# Altium PCB Holder_Accu.PcbDoc
Units mm, origin at the board's own origin, x right, y up, seen from the top; angles counter-clockwise.
Board outline 356.65 x 138 mm, 2 copper layers (Top Layer, Bottom Layer); 20 components, 15 nets, 102 pads, 36 vias.
Unrouted connection lines stored in the file: 15.
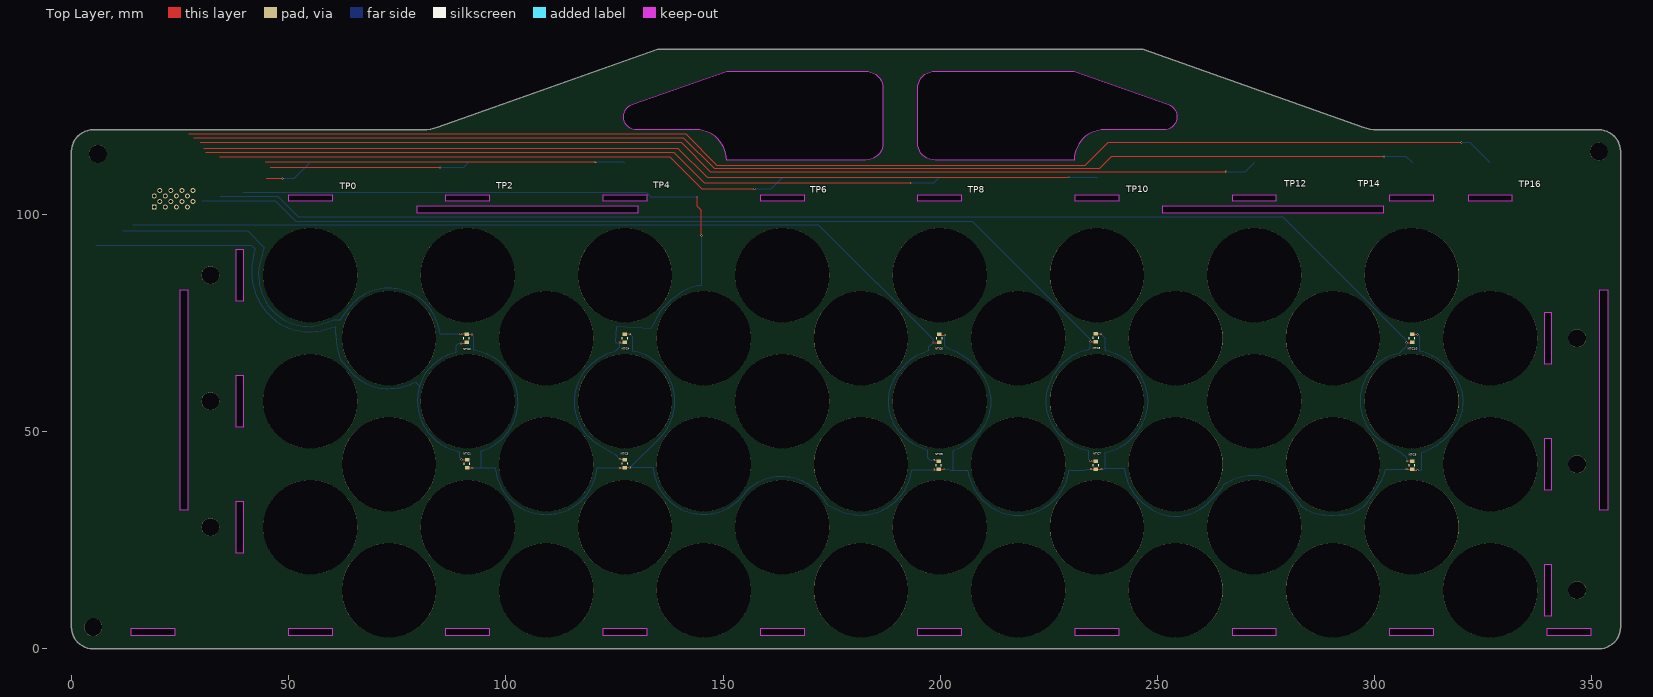
[diagram p0: Top Layer view]
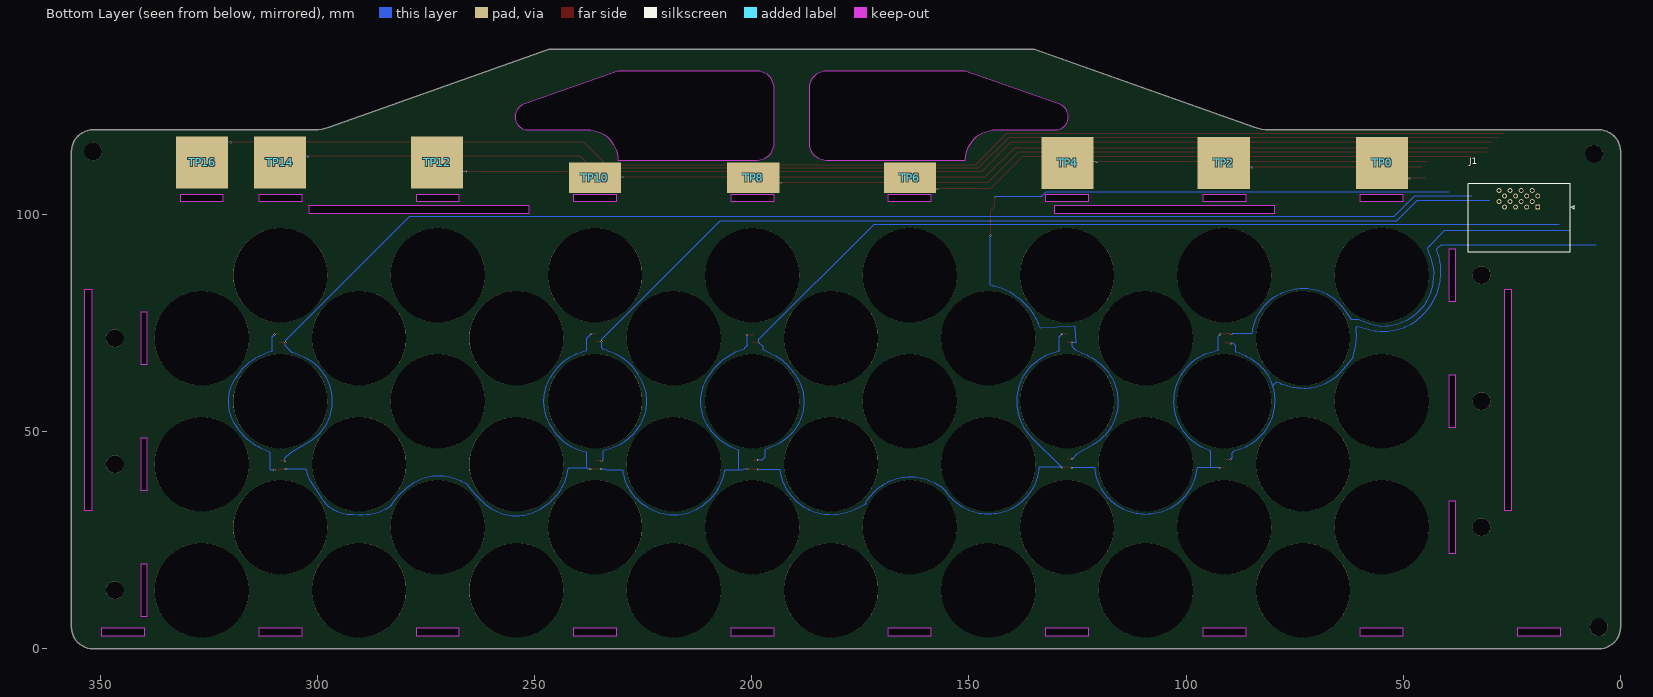
[diagram p1: Bottom Layer view, seen from below]
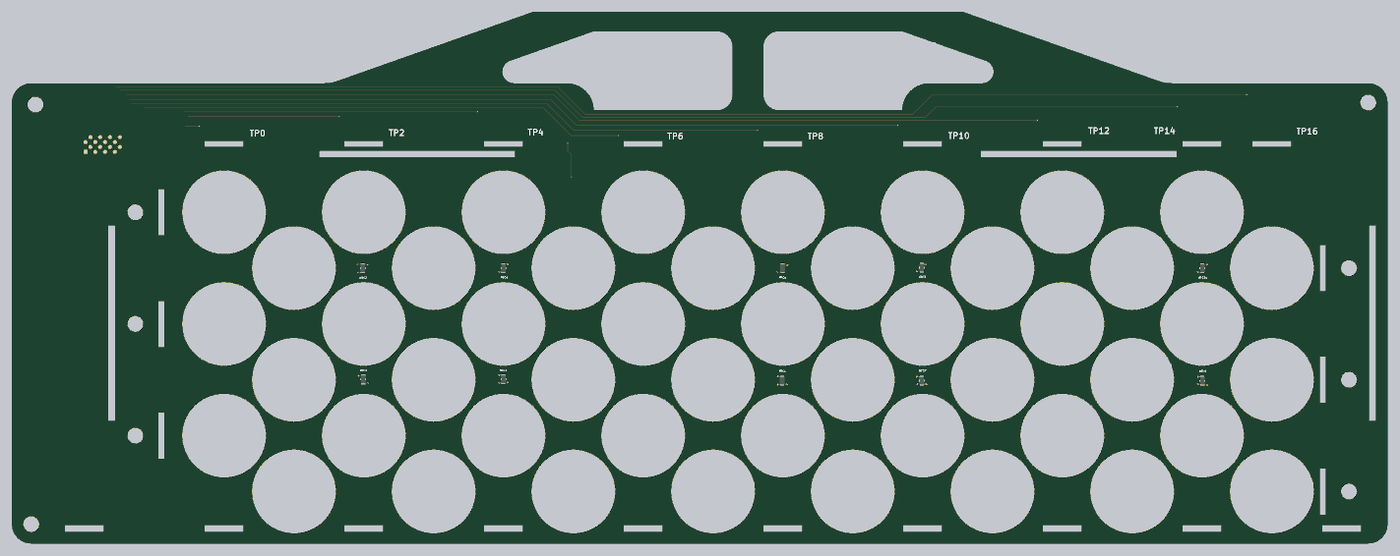
[diagram p2: 3D render of the assembled board from above, using the file's embedded part models]

## Layer stack, top to bottom
Top Solder: solder mask 0.0102, Solder Resist, Dk 3.5
Top Layer: signal copper 0.0356
Dielectric 1: dielectric 0.32, FR-4, Dk 4.8
Bottom Layer: signal copper 0.0356
Bottom Solder: solder mask 0.0102, Solder Resist, Dk 3.5

## Board outline
134.97,138.002 84.303,120.074 83.49,119.825 82.659,119.646 81.816,119.538 80.967,119.502 4.993,119.502 4.34,119.459 3.699,119.331 3.079,119.121 2.493,118.832 1.949,118.469 1.457,118.037 1.026,117.546 0.663,117.002 0.373,116.415 0.163,115.796 0.036,115.154 -0.007,114.502 -0.007,5.002 0.036,4.349 0.163,3.708 0.373,3.088 0.663,2.502 1.026,1.958 1.457,1.466 1.949,1.035 2.493,0.672 3.079,0.382 3.699,0.172 4.34,0.045 4.993,0.002 351.643,0.002 352.296,0.045 352.937,0.172 353.557,0.382 354.143,0.672 354.687,1.035 355.179,1.466 355.61,1.958 355.973,2.502 356.263,3.088 356.473,3.708 356.6,4.349 356.643,5.002 356.643,114.502 356.6,115.154 356.473,115.796 356.263,116.415 355.973,117.002 355.61,117.546 355.179,118.037 354.687,118.469 354.143,118.832 353.557,119.121 352.937,119.331 352.296,119.459 351.643,119.502 300.669,119.502 299.82,119.538 298.977,119.646 298.146,119.825 297.333,120.074 246.666,138.002
cut-out: 230.818,112.502 198.818,112.502 198.192,112.551 197.582,112.698 197.002,112.938 196.467,113.266 195.99,113.673 195.582,114.151 195.254,114.686 195.014,115.266 194.867,115.876 194.818,116.502 194.818,129.002 194.867,129.628 195.014,130.238 195.254,130.818 195.582,131.353 195.99,131.83 196.467,132.238 197.002,132.566 197.582,132.806 198.192,132.953 198.818,133.002 230.818,133.002 252.501,125.33 252.978,125.112 253.41,124.815 253.784,124.447 254.088,124.019 254.313,123.545 254.451,123.039 254.5,122.517 254.457,121.994 254.323,121.487 254.103,121.011 253.803,120.58 253.433,120.208 253.004,119.906 252.529,119.684 252.022,119.548 251.5,119.502 237.818,119.502 237.034,119.458 236.26,119.326 235.506,119.109 234.781,118.809 234.094,118.429 233.454,117.975 232.868,117.452 232.345,116.866 231.891,116.226 231.511,115.539 231.211,114.814 230.994,114.059 230.862,113.286
cut-out: 49.993,4.752 59.993,4.752 59.993,3.002 49.993,3.002
cut-out: 303.533,3.002 303.533,4.752 313.533,4.752 313.533,3.002
cut-out: 340.643,7.502 339.143,7.502 339.143,19.502 340.643,19.502
cut-out: 39.493,22.002 37.993,22.002 37.993,34.002 39.493,34.002
cut-out: 340.643,36.502 339.143,36.502 339.143,48.502 340.643,48.502
cut-out: 39.493,51.002 37.993,51.002 37.993,63.002 39.493,63.002
cut-out: 339.753,4.752 349.753,4.752 349.753,3.002 339.753,3.002
cut-out: 267.313,4.752 277.313,4.752 277.313,3.002 267.313,3.002
cut-out: 194.873,4.752 204.873,4.752 204.873,3.002 194.873,3.002
cut-out: 122.433,4.752 132.433,4.752 132.433,3.002 122.433,3.002
cut-out: 24.993,31.877 24.993,82.627 26.743,82.627 26.743,31.877
cut-out: 302.018,102.002 302.018,100.252 251.268,100.252 251.268,102.002
cut-out: 79.618,102.002 130.368,102.002 130.368,100.252 79.618,100.252
cut-out: 351.893,82.627 353.643,82.627 353.643,31.877 351.893,31.877
cut-out: 49.993,104.502 59.993,104.502 59.993,103.002 49.993,103.002
cut-out: 86.213,104.502 96.213,104.502 96.213,103.002 86.213,103.002
cut-out: 122.433,104.502 132.433,104.502 132.433,103.002 122.433,103.002
cut-out: 158.653,104.502 168.653,104.502 168.653,103.002 158.653,103.002
cut-out: 231.093,104.502 241.093,104.502 241.093,103.002 231.093,103.002
cut-out: 267.313,104.502 277.313,104.502 277.313,103.002 267.313,103.002
cut-out: 303.533,104.502 313.533,104.502 313.533,103.002 303.533,103.002
cut-out: 339.143,77.502 340.643,77.502 340.643,65.502 339.143,65.502
cut-out: 37.993,92.002 39.493,92.002 39.493,80.002 37.993,80.002
cut-out: 241.093,4.752 241.093,3.002 231.093,3.002 231.093,4.752
cut-out: 168.653,4.752 168.653,3.002 158.653,3.002 158.653,4.752
cut-out: 96.213,4.752 96.213,3.002 86.213,3.002 86.213,4.752
cut-out: 23.773,4.752 23.773,3.002 13.773,3.002 13.773,4.752
cut-out: 321.643,104.502 331.643,104.502 331.643,103.002 321.643,103.002
cut-out: 194.873,104.502 204.873,104.502 204.873,103.002 194.873,103.002
cut-out: 186.818,129.002 186.818,116.502 186.769,115.876 186.622,115.266 186.382,114.686 186.054,114.151 185.646,113.673 185.169,113.266 184.634,112.938 184.054,112.698 183.444,112.551 182.818,112.502 150.818,112.502 150.774,113.286 150.643,114.059 150.425,114.814 150.125,115.539 149.745,116.226 149.291,116.866 148.768,117.452 148.182,117.975 147.542,118.429 146.855,118.809 146.13,119.109 145.376,119.326 144.602,119.458 143.818,119.502 130.136,119.502 129.614,119.548 129.107,119.684 128.632,119.906 128.203,120.208 127.833,120.58 127.533,121.011 127.313,121.487 127.179,121.994 127.136,122.517 127.185,123.039 127.324,123.545 127.548,124.019 127.852,124.447 128.226,124.815 128.658,125.112 129.136,125.33 150.818,133.002 182.818,133.002 183.444,132.953 184.054,132.806 184.634,132.566 185.169,132.238 185.646,131.83 186.054,131.353 186.382,130.818 186.622,130.238 186.769,129.628

## Design rules (kind name [scope] priority, off if disabled: settings)
Clearance [All] p1: gap=0.254 ignorepadtopadclearanceinfootprint=FALSE
DiffPairsRouting [All] p1: maxlimit=0.2 minlimit=0.2 mostfreqgap=0.2 toplayer_minwidth=0.2 toplayer_maxwidth=0.2 toplayer_prefwidth=0.2 bottomlayer_minwidth=0.2 bottomlayer_maxwidth=0.2 bottomlayer_prefwidth=0.2 maxuncoupledlength=12.7
PolygonConnect [All] p1: connectstyle=Relief reliefconductorwidth=0.254 reliefentries=4 polygonreliefangle="90 Angle" airgapwidth=0.254
RoutingVias [All] p1: holewidth=0.711 width=1.27 viastyle="Through Hole" minholewidth=0.711 minwidth=1.27 maxholewidth=0.711 maxwidth=1.27
SolderMaskExpansion [All] p1: expansion=0.102 istentingtop=FALSE
SupplyNets "Schematic Supply Nets" [InNet('GND')] p1: voltage=0.000
UnRoutedNet [All] p1: checkbadconnections=TRUE
Width [All] p1: maxlimit=0.2 minlimit=0.2 preferedwidth=0.2
28 further rules are at their usual default settings.

## Components (designator, comment, footprint, x,y, rotation, side; value= is the part's Value field where it differs from the comment)
J1 "459850121" MOLEX_459850121 19.077,101.722 r180 bottom
NTC1 "NTC_0805" NTC_0805 91.086,42.631 r270 top
NTC2 "NTC_0805" NTC_0805 90.959,71.496 r90 top
NTC3 "NTC_0805" NTC_0805 127.408,42.667 r270 top
NTC4 "NTC_0805" NTC_0805 127.408,71.496 r90 top
NTC5 "NTC_0805" NTC_0805 199.671,42.286 r270 top
NTC6 "NTC_0805" NTC_0805 199.798,71.496 r90 top
NTC7 "NTC_0805" NTC_0805 235.866,42.286 r270 top
NTC8 "NTC_0805" NTC_0805 235.866,71.623 r90 top
NTC9 "NTC_0805" NTC_0805 308.637,42.286 r270 top
NTC10 "NTC_0805" NTC_0805 308.637,71.496 r90 top
TP0 "Test Point" TESTPOINT_WIDE#1 54.891,111.882 r0 top
TP2 "Test Point" TESTPOINT_WIDE#1 91.34,111.882 r0 top
TP4 "Test Point" TESTPOINT_WIDE#1 127.281,111.882 r0 top
TP6 "Test Point" TESTPOINT_WIDE#2 163.603,108.453 r0 top
TP8 "Test Point" TESTPOINT_WIDE#2 199.671,108.453 r0 top
TP10 "Test Point" TESTPOINT_WIDE#2 236.12,108.453 r0 top
TP12 "Test Point" TESTPOINT_WIDE#1 272.442,112.009 r0 top
TP14 "Test Point" TESTPOINT_WIDE#1 308.637,112.009 r0 top
TP16 "Test Point" TESTPOINT_WIDE#1 326.544,112.009 r0 top

## Footprints (in the part's own frame and the unit in brackets; to place one, negate y for a bottom-side part, rotate by r counter-clockwise, add the part's x,y. Pads: shape width x height; smd on the part's side, far side on the other; paste and mask are expansions set on the pad)
MOLEX_459850121 [mm]
  rect 1.11x1.11 / inner round 1.11 / far side rect 1.11x1.11 hole 0.76 mask+0.076: 1(0,0)
  round 1.11 hole 0.76 mask+0.076: 2(-1.27,1.27) 3(-2.54,0) 4(-3.81,1.27) 5(-5.08,0) 6(-6.35,1.27) 7(-7.62,0) 8(-8.89,1.27) 9(0,2.54) 10(-1.27,3.81) 11(-2.54,2.54) 12(-3.81,3.81) 13(-5.08,2.54) 14(-6.35,3.81) 15(-7.62,2.54) 16(-8.89,3.81)
  silkscreen extent -15.99,-10.4 8.38,5.38, body extent -11.94,-11.32 3.08,4.97, height 7.49
NTC_0805 [mm]
  rect 0.8x1.05 smd: 1(-0.925,0) 2(0.925,0)
  silkscreen extent -0.21,-0.63 0.21,0.63, body extent -1,-0.6 1,0.6, height 1.3
TESTPOINT_WIDE#1 [mm]
  rect 12x12 smd far side paste-2539.97: 1(0,0)
TESTPOINT_WIDE#2 [mm]
  rect 12x7 smd far side paste-2539.97: 1(0,0)

## Part data
J1: Package=None, Availability=Unavailable, MP=459850121, Price=None
NTC1 NTC2 NTC3 NTC4 NTC5 NTC6 NTC7 NTC8 NTC9 NTC10: "NTC Thermistor 10k 0805 (2012 Metric)", Package="0805 TDK", Check_prices=https://www.snapeda.com/parts/NTCG203NH103JTDS/TDK/view-part/?ref=eda, MF="TDK Corporation", MP=NTCG203NH103JTDS, SnapEDA_Link=https://www.snapeda.com/parts/NTCG203NH103JTDS/TDK/view-part/?ref=snap
TP0 TP2 TP4 TP6 TP8 TP10 TP12 TP14 TP16: library part TestPoint_Wide, "TestPoint 5x5mm"

## Free pads (board coordinates)
  round 4.1 hole 4.1: 1(31.993,28.002) 1(31.993,57.002) 1(31.993,86.002) 1(346.643,13.502) 1(346.643,42.502) 1(346.643,71.502) 2(6.09,113.959) 3(5,5) 4(351.646,114.499)
  round 21.7 hole 21.7: 1(54.993,28.002) 1(54.993,57.002) 1(54.993,86.002) 1(73.103,13.502) 1(73.103,42.502) 1(73.103,71.502) 1(91.213,28.002) 1(91.213,57.002) 1(91.213,86.002) 1(109.323,13.502) 1(109.323,42.502) 1(109.323,71.502) 1(127.433,28.002) 1(127.433,57.002) 1(127.433,86.002) 1(145.543,13.502) 1(145.543,42.502) 1(145.543,71.502) 1(163.653,28.002) 1(163.653,57.002) 1(163.653,86.002) 1(181.763,13.502) 1(181.763,42.502) 1(181.763,71.502) 1(199.873,28.002) 1(199.873,57.002) 1(199.873,86.002) 1(217.983,13.502) 1(217.983,42.502) 1(217.983,71.502) 1(236.093,28.002) 1(236.093,57.002) 1(236.093,86.002) 1(254.203,13.502) 1(254.203,42.502) 1(254.203,71.502) 1(272.313,28.002) 1(272.313,57.002) 1(272.313,86.002) 1(290.423,13.502) 1(290.423,42.502) 1(290.423,71.502) 1(308.533,28.002) 1(308.533,57.002) 1(308.533,86.002) 1(326.643,13.502) 1(326.643,42.502) 1(326.643,71.502)

## Via types
v1: diameter 0.45, hole 0.3, Top Layer to Bottom Layer, 21 vias
v2: diameter 0.45, hole 0.3, Top Layer to Bottom Layer, tented both sides, 14 vias
v3: diameter 0.4, hole 0.3, Top Layer to Bottom Layer, 1 vias

## Nets (pads, with @x,y where several pads share a name; then routed paths per layer and width w, separated by ;. In a path a pad name is that pad's centre, name@x,y a point inside that pad or via, vN(x,y) a via of type N, cw(c..) or ccw(c..) an arc to the next point about the centre after c; other vN are vias at no path point)
GND: J1.15 NTC1.2 NTC2.2 NTC3.2 NTC4.2 NTC5.2 NTC6.2 NTC7.2 NTC8.2 NTC9.2 NTC10.2 | length 586.9
  Top Layer w0.2: v2(89.562,72.512) 90.868,72.512 90.995,72.385 v2(92.229,72.385) ; NTC1.2 91.141,41.651 v1(92.356,41.651) ; v1(126.265,41.651) 127.317,41.651 127.444,41.778 v1(128.551,41.778) ; NTC4.2 127.499,72.512 v1(128.551,72.512) ; v1(198.528,41.27) 199.58,41.27 199.707,41.397 v1(200.941,41.397) ; NTC6.2 199.961,72.258 v1(201.068,72.258) ; v1(234.723,41.397) v1(237.136,41.397) ; NTC8.2 235.902,72.512 v3(237.009,72.512) ; v1(307.367,41.397) 308.601,41.397 308.855,41.143 v1(309.907,41.143) ; NTC10.2 308.673,72.385 v1(309.907,72.385)
  Bottom Layer w0.2: 11.838,96.261 40.54,96.261 44.422,92.38 44.43,92.371 44.43,92.205 43.913,90.572 ccw(c73.093,81.337) 42.947,86.626 42.951,86.597 43.194,84.469 43.195,84.462 ccw(c54.651,85.78) 54.017,74.267 55.252,74.199 ccw(c51.228,96.012) 55.276,74.203 ccw(c51.228,96.012) 60.319,75.779 61.865,75.824 61.944,75.826 62.012,75.894 63.765,78.327 cw(c72.938,71.716) 76.026,82.593 cw(c73.295,71.349) 84.724,73.157 84.807,72.629 84.924,72.512 84.987,72.512 v2(89.562,72.512) ; v2(92.229,72.385) 92.61,72.004 92.61,68.89 92.61,68.834 92.639,68.787 ccw(c92.81,68.89) 92.778,68.692 ; v1(92.356,41.651) 94.388,41.651 ; 92.778,68.692 cw(c90.951,56.978) 102.77,57.907 cw(c90.901,56.974) 94.527,45.634 ccw(c94.588,45.444) 94.397,45.502 94.388,45.473 94.388,45.444 94.388,41.651 ; v1(126.265,41.651) 121.088,41.651 120.971,41.534 120.901,41.037 cw(c109.276,42.664) 109.275,30.926 cw(c109.276,42.665) 97.592,41.534 97.475,41.651 97.41,41.651 94.388,41.651 ; v1(128.551,41.778) v1@128.678,41.778 ; v1(128.551,72.512) 129.186,71.878 129.186,68.689 129.21,68.644 ccw(c129.385,68.739) 129.348,68.543 cw(c127.239,57.039) 138.921,57.614 cw(c126.896,57.022) 135.409,48.509 v1@128.678,41.778 ; v1(198.528,41.27) 193.612,41.27 193.495,41.153 193.383,40.559 cw(c181.631,42.77) 176.36,32.035 174.021,33.184 173.977,33.227 173.785,33.573 ccw(c163.498,27.854) 157.405,37.923 156.46,37.352 156.445,37.343 156.357,37.265 155.155,36.063 155.145,36.048 155.094,35.975 cw(c145.535,42.619) 143.61,31.138 cw(c145.541,42.655) 133.958,41.173 133.898,41.642 133.781,41.759 133.715,41.759 128.697,41.759 v1@128.678,41.778 ; v1(200.941,41.397) 201.993,41.397 202.325,41.065 203.051,41.065 ; v1(201.068,72.258) 201.068,69.839 201.703,69.204 201.762,69.145 201.795,69.111 cw(c196.87,54.199) 207.976,65.303 cw(c199.499,56.828) 209.1,64.004 209.618,63.311 cw(c201.075,56.923) 209.62,50.537 cw(c198.505,58.844) 204.118,46.154 203.168,45.734 203.051,45.617 203.051,45.592 203.051,41.065 ; v1(234.723,41.397) 233.719,41.397 233.387,41.065 229.776,41.065 229.659,40.948 cw(c217.989,42.71) 223.454,32.249 222.847,31.932 cw(c217.927,41.352) 213.007,31.932 212.774,32.054 212.772,32.055 cw(c218.435,42.894) 206.485,40.298 206.343,40.948 206.226,41.065 206.173,41.065 203.051,41.065 ; v3(237.009,72.512) 238.044,71.477 238.044,68.75 238.064,68.71 ccw(c238.244,68.796) 238.2,68.6 cw(c235.615,56.735) 246.026,62.986 246.366,62.42 cw(c237.292,56.975) 246.364,51.527 245.884,50.728 cw(c235.75,56.813) 238.817,45.397 238.161,45.221 238.044,45.104 238.044,45.056 238.044,41.723 237.926,41.589 ; v1(237.136,41.397) 237.771,41.397 237.946,41.572 242.256,41.572 242.374,41.455 242.475,40.875 ccw(c254.555,42.991) 247.384,33.042 ccw(c261.563,52.717) 248.821,32.082 ccw(c254.288,40.937) 261.258,33.21 ccw(c240.394,56.347) 265.457,37.841 cw(c265.618,37.721) 265.512,37.891 cw(c272.8,26.091) 270.886,39.828 cw(c272.243,28.54) 270.888,39.828 cw(c272.243,28.54) 272.065,39.907 cw(c272.217,30.155) 274.92,39.526 cw(c271.601,28.008) 279.401,37.111 cw(c262.365,17.674) 281.84,34.666 cw(c275.836,29.428) 282.41,33.93 283.043,33.006 ; 283.044,33.005 ccw(c283.208,33.119) 283.082,32.964 ccw(c289.2,40.626) 288.601,30.839 ccw(c290.24,68.577) 292.718,30.885 ccw(c292.193,38.88) 298.908,34.509 301.821,38.986 ccw(c285.676,45.205) 301.829,39.006 ccw(c285.676,45.205) 302.365,40.643 302.491,41.101 302.505,41.153 302.542,41.19 302.749,41.397 v1(307.367,41.397) ; v1(309.907,41.143) 310.806,41.143 310.923,41.26 310.923,45.149 310.923,45.177 311.04,45.294 311.99,45.684 ccw(c306.483,59.094) 318.592,51.122 318.85,51.515 ccw(c310.682,56.893) 318.85,62.272 317.596,64.177 317.479,64.293 317.425,64.347 316.317,65.456 ccw(c307.98,56.015) 314.781,66.616 ccw(c305.436,52.049) 310.58,68.573 cw(c310.641,68.764) 310.45,68.704 310.441,68.733 310.441,68.764 310.441,71.851 310.382,71.91 v1(309.907,72.385)
NetJ1_1: J1.1 TP0.1 | length 11.5
  Top Layer w0.2: 44.858,108.326 v2(48.541,108.326)
  Bottom Layer w0.2: v2(48.541,108.326) 51.335,108.326 TP0.1
NetJ1_2: J1.2 TP2.1 | length 46
  Top Layer w0.2: 45.747,110.866 v2(84.863,110.866)
  Bottom Layer w0.2: v2(84.863,110.866) 90.324,110.866 TP2.1
NetJ1_3: J1.3 TP4.1 | length 82.8
  Top Layer w0.2: 44.604,112.136 v2(120.677,112.136)
  Bottom Layer w0.2: v2(120.677,112.136) 127.027,112.136 TP4.1
NetJ1_4: J1.4 TP6.1 | length 133.5
  Top Layer w0.2: 34.19,113.279 137.695,113.279 145.061,105.913 v2(157.253,105.913)
  Bottom Layer w0.2: v2(157.253,105.913) 161.063,105.913 TP6.1
NetJ1_5: J1.5 TP8.1 | length 172.1
  Top Layer w0.2: 30.888,114.295 138.711,114.295 145.696,107.31 v2(193.321,107.31)
  Bottom Layer w0.2: v2(193.321,107.31) 198.528,107.31 TP8.1
NetJ1_6: J1.6 TP10.1 | length 208.5
  Top Layer w0.2: 30.507,115.311 139.6,115.311 146.331,108.58 v2(229.643,108.58)
  Bottom Layer w0.2: v2(229.643,108.58) 235.993,108.58 TP10.1
NetJ1_7: J1.7 TP12.1 | length 246.5
  Top Layer w0.2: 29.618,116.581 140.362,116.581 147.089,109.854 v2(265.829,109.854)
  Bottom Layer w0.2: v2(265.829,109.854) 270.288,109.854 TP12.1
NetJ1_8: J1.8 TP14.1 | length 285.2
  Top Layer w0.2: 28.094,117.724 140.88,117.724 147.992,110.612 236.755,110.612 239.549,113.406 v2(302.16,113.406)
  Bottom Layer w0.2: v2(302.16,113.406) 307.24,113.406 TP14.1
NetJ1_9: J1.9 NTC1.1 NTC2.1 | length 138
  Top Layer w0.2: v2(89.689,70.353) 90.741,70.353 NTC2.1 ; v1(89.816,43.556) NTC1.1
  Bottom Layer w0.2: 5.615,92.959 41.429,92.959 42.31,92.078 42.319,92.07 42.319,91.904 41.998,90.772 ccw(c55.791,86.868) 45.858,76.532 ccw(c54.662,85.694) 57.937,73.417 60.635,74.137 60.744,74.137 60.862,74.019 60.862,72.586 ; 60.862,72.585 ccw(c78.593,72.586) 61.876,66.673 ccw(c98.485,95.535) 64.659,63.456 ccw(c72.865,71.239) 73.549,59.95 ccw(c73.321,71.152) 75.956,60.262 ccw(c72.2,75.785) 79.125,61.393 79.17,61.393 79.253,61.393 80.13,60.517 ; v2(89.689,70.353) 89.672,70.336 89.164,70.336 88.577,69.748 88.577,68.408 88.46,68.29 87.638,68.011 ccw(c91.732,55.997) 84.863,66.67 ccw(c91.516,56.333) 81.918,64.014 ccw(c90.353,57.494) 81.917,64.012 ccw(c90.353,57.494) 80.13,60.517 ; v1(89.816,43.556) 89.426,43.946 89.426,45.139 89.084,45.481 89.032,45.494 88.544,45.622 cw(c91.546,57.142) 80.13,60.516
NetJ1_10: J1.10 NTC3.1 NTC4.1 | length 193.1
  Top Layer w0.2: v1(126.265,43.683) 127.317,43.683 NTC3.1 ; v1(126.265,70.48) 127.317,70.48 NTC4.1 ; v2(144.075,104.031) 144.075,101.905 145.03,100.95 v2(145.03,95.145)
  Bottom Layer w0.2: 39.586,105.121 132.314,105.121 133.405,104.031 v2(144.075,104.031) ; v1(126.265,43.683) 125.184,44.764 125.166,44.782 121.375,47.012 cw(c127.2,56.906) 116.542,61.175 cw(c127.349,56.728) 119.316,65.216 cw(c128.822,55.172) 124.101,68.17 125.334,68.618 126.265,69.55 v1(126.265,70.48) 125.38,70.48 125.263,70.597 125.263,70.686 125.496,74.167 125.608,74.279 125.698,74.279 125.704,74.279 133.481,73.757 133.52,73.761 133.637,73.878 134.031,74.84 cw(c146.634,69.687) 137.396,79.69 cw(c155.829,59.73) 139.829,81.689 cw(c146.283,72.832) 144.544,83.652 144.55,83.653 144.957,83.718 145.061,83.822 145.061,95.114 v2(145.03,95.145)
NetJ1_11: J1.11 NTC5.1 NTC6.1 | length 235.6
  Top Layer w0.2: v1(198.401,70.48) 199.707,70.48 NTC6.1 ; v1(198.528,43.429) 199.453,43.429 NTC5.1
  Bottom Layer w0.2: 14.124,97.658 171.985,97.658 198.384,71.259 198.384,70.497 v1(198.401,70.48) 197.425,69.503 197.366,69.445 197.366,68.795 197.281,68.71 195.618,67.977 ccw(c200.509,56.889) 190.895,64.266 190.255,63.432 ccw(c198.779,56.891) 190.254,50.351 ccw(c199.845,57.707) 195.042,46.616 196.943,45.792 197.029,45.707 197.029,44.166 197.766,43.429 v1(198.528,43.429)
NetJ1_12: J1.12 NTC7.1 NTC8.1 | length 258.2
  Top Layer w0.2: v1(234.596,43.302) 235.775,43.302 NTC7.1 ; v1(234.596,70.734) 235.83,70.734 NTC8.1
  Bottom Layer w0.2: 30.126,103.119 46.89,103.119 51.589,98.42 207.418,98.42 234.579,71.259 234.579,70.751 v1(234.596,70.734) 234.596,69.359 234.137,68.899 234.098,68.86 234.045,68.847 233.457,68.695 ccw(c236.399,57.337) 226.293,63.297 225.794,62.451 ccw(c235.083,56.971) 225.801,51.481 ccw(c236.36,57.721) 233.38,45.823 234.098,45.644 234.215,45.526 234.215,45.478 234.215,43.683 v1(234.596,43.302)
NetJ1_13: J1.13 NTC9.1 NTC10.1 | length 326.9
  Top Layer w0.2: v1(307.367,70.48) 308.546,70.48 NTC10.1 ; v1(307.494,43.302) 308.546,43.302 NTC9.1
  Bottom Layer w0.2: 34.263,104.189 47.471,104.189 52.224,99.436 278.919,99.436 307.35,71.005 307.35,70.497 v1(307.367,70.48) 307.367,69.777 305.785,68.194 305.752,68.161 305.707,68.146 304.254,67.658 ccw(c307.802,57.093) 302.201,47.458 306.111,45.183 306.142,45.16 306.157,45.147 306.166,45.138 307.477,43.827 307.477,43.319 v1(307.494,43.302)
NetJ1_16: J1.16 TP16.1 | length 306.6
  Top Layer w0.2: 26.951,118.613 141.378,118.613 148.617,111.374 233.453,111.374 238.66,116.581 v2(320.067,116.581)
  Bottom Layer w0.2: v2(320.067,116.581) 321.972,116.581 TP16.1
pads on no net: J1.14

## Text inside footprints (layer, text, board x,y; h text height)
J1: Mechanical 13 "PTH D0.76 +/- 0.05" at 34.777,110.097 h0.5